# EAGLE board Cricket Score Counter (EAGLE 9.7.0)

Size 248.11 x 148.61 mm. Coordinates in mm from the lower left corner, seen from the top.
Outline: 0,0 248.11,0 248.11,148.61 0,148.61 0,0
Copper layers (1*16): Top 0.035mm / dielectric 1.5mm / Bottom 0.035mm
Design rules "default": minimum track width 6mil, minimum drill 0.35mm, track to track 6mil, track to pad 6mil, pad to pad 6mil, via to via 6mil, smd to smd 6mil, copper to edge 40mil, drill to drill 6mil, minimum pad ring 10mil, minimum via ring 8mil, stop-mask expansion 4mil, vias tented up to drill 0mil, thermal gap 10mil

## Footprints (pad centres in the part's own frame; a part is rotated, then mirrored left to right if it is on the bottom)
LEDRD254W60D565H860B = drill 0.981 pad 1.581: 1 -1.27,0; 2 1.27,0
RESAD1016W63L850D250B = drill 0.83 pad 1.43: 1 -5.08,0; 2 5.08,0
SWITCH-MOMENTARY-PTH-6.5MM = drill 1.016 pad 1.88: 1 -3.251,2.261; 2 3.251,2.261; 3 -3.251,-2.261; 4 3.251,-2.261
LCD-I2C = drill 1.016 long: 1 -19.05,-5.08; 2 -19.05,-7.62; 3 -19.05,-10.16; 4 -19.05,-12.7
ARDUINO-UNO-R3-SHIELD = drill 1.016 pad 1.88: 3.3V 24.13,-2.54; 5V 24.13,0; A0 24.13,12.7; A1 24.13,15.24; A2 24.13,17.78; A3 24.13,20.32; A4 24.13,22.86; A5 24.13,25.4; AREF -24.13,-13.97; D2 -24.13,20.32; D3 -24.13,17.78; D4 -24.13,15.24; D5 -24.13,12.7; D6 -24.13,10.16; D7 -24.13,7.62; D8 -24.13,3.81; D9 -24.13,1.27; D10 -24.13,-1.27; D11 -24.13,-3.81; D12 -24.13,-6.35; D13 -24.13,-8.89; GND@0 24.13,2.54; GND@1 24.13,5.08; GND@2 -24.13,-11.43; IOREF 24.13,-7.62; NC 24.13,-10.16; RES 24.13,-5.08; RX -24.13,25.4; SCL -24.13,-19.05; SDA -24.13,-16.51; TX -24.13,22.86; VIN 24.13,7.62

## Placement (x,y rotation side)
D1  RED  [LEDRD254W60D565H860B]  113.46,47.42 180 top
R1  220  [RESAD1016W63L850D250B]  112.19,42.34 90 top
R2  10k  [RESAD1016W63L850D250B]  135.72,127.28 90 top
R3  10k  [RESAD1016W63L850D250B]  186.52,127.28 90 top
R4  10k  [RESAD1016W63L850D250B]  237.32,127.28 90 top
R5  10k  [RESAD1016W63L850D250B]  135.72,84.1 90 top
R6  10k  [RESAD1016W63L850D250B]  186.52,84.1 90 top
R7  10k  [RESAD1016W63L850D250B]  237.32,84.1 90 top
R8  10k  [RESAD1016W63L850D250B]  135.72,46 90 top
R9  10k  [RESAD1016W63L850D250B]  186.52,46 90 top
R10  10k  [RESAD1016W63L850D250B]  237.32,46 90 top
R11  10k  [RESAD1016W63L850D250B]  135.72,12.98 90 top
S1_RUN  SWITCH_MOMENTARY  [SWITCH-MOMENTARY-PTH-6.5MM]  138.26,98.07 90 top
S2_RUN  SWITCH_MOMENTARY  [SWITCH-MOMENTARY-PTH-6.5MM]  189.06,98.07 90 top
S3_RUN  SWITCH_MOMENTARY  [SWITCH-MOMENTARY-PTH-6.5MM]  239.86,98.07 90 top
S4_RUN  SWITCH_MOMENTARY  [SWITCH-MOMENTARY-PTH-6.5MM]  138.26,59.97 90 top
S5_RUN  SWITCH_MOMENTARY  [SWITCH-MOMENTARY-PTH-6.5MM]  189.06,59.97 90 top
S6_RUN  SWITCH_MOMENTARY  [SWITCH-MOMENTARY-PTH-6.5MM]  239.86,59.97 90 top
SNO_BALL  SWITCH_MOMENTARY  [SWITCH-MOMENTARY-PTH-6.5MM]  138.26,141.25 90 top
SPUBLISH  SWITCH_MOMENTARY  [SWITCH-MOMENTARY-PTH-6.5MM]  138.26,21.87 90 top
SWICKET  SWITCH_MOMENTARY  [SWITCH-MOMENTARY-PTH-6.5MM]  239.86,141.25 90 top
SWIDE  SWITCH_MOMENTARY  [SWITCH-MOMENTARY-PTH-6.5MM]  189.06,141.25 90 top
U1  LCD-16X2-I2CSUNFOUNDER-IIC  [LCD-I2C]  30.73,36.63 0 top
U2  ARDUINO-UNO-R3-SHIELD  [ARDUINO-UNO-R3-SHIELD]  56.39,94.87 270 top

## Library data of the parts
D1 = Tinkercad; CATEGORY: Opto-Electronic; SUB-CATEGORY: LED; VALUE: LED_RED
R1-R11 S1_RUN S2_RUN S3_RUN S4_RUN S5_RUN S6_RUN SNO_BALL SPUBLISH SWICKET SWIDE U1 U2 = Tinkercad

## Nets
D1_C: D1.2 R1.2
U2_5V: S1_RUN.3 S2_RUN.3 S3_RUN.3 S4_RUN.3 S5_RUN.3 S6_RUN.3 SNO_BALL.3 SPUBLISH.3 SWICKET.3 SWIDE.3 U1.2 U2.5V
U2_D3: D1.1 U2.D3
U2_D4: R11.2 SPUBLISH.1 SPUBLISH.2 U2.D4
U2_D5: R10.2 S6_RUN.1 S6_RUN.2 U2.D5
U2_D6: R9.2 S5_RUN.1 S5_RUN.2 U2.D6
U2_D7: R8.2 S4_RUN.1 S4_RUN.2 U2.D7
U2_D8: R7.2 S3_RUN.1 S3_RUN.2 U2.D8
U2_D9: R6.2 S2_RUN.1 S2_RUN.2 U2.D9
U2_D10: R5.2 S1_RUN.1 S1_RUN.2 U2.D10
U2_D11: R4.2 SWICKET.1 SWICKET.2 U2.D11
U2_D12: R3.2 SWIDE.1 SWIDE.2 U2.D12
U2_D13: R2.2 SNO_BALL.1 SNO_BALL.2 U2.D13
U2_GND: R1.1 R2.1 R3.1 R4.1 R5.1 R6.1 R7.1 R8.1 R9.1 R10.1 R11.1 U1.1 U2.GND@0 U2.GND@1 U2.GND@2
U2_SCL: U1.4 U2.SCL
U2_SDA: U1.3 U2.SDA

## Tracks (layer width: path | path; a pad name or v marks a point on that pad's centre or on a via)
D1_C  (1 unrouted)
U2_5V  (11 unrouted)
U2_D3  (1 unrouted)
U2_D4  (3 unrouted)
U2_D5  (3 unrouted)
U2_D6  (3 unrouted)
U2_D7  (3 unrouted)
U2_D8  (3 unrouted)
U2_D9  (3 unrouted)
U2_D10  (3 unrouted)
U2_D11  (3 unrouted)
U2_D12  (3 unrouted)
U2_D13  (3 unrouted)
U2_GND  (14 unrouted)
U2_SCL  (1 unrouted)
U2_SDA  (1 unrouted)